# Altium PCB BW0253.PcbDoc (part 2 of 2)
Units mil, origin at the board's own origin, x right, y up, seen from the top; angles counter-clockwise.
Board outline 984.25 x 939.45 mil, 4 copper layers (Top Layer, MidLayer 1, MidLayer 2, Bottom Layer), stack 63.115 mil thick; 49 components, 37 nets, 139 pads, 74 vias.
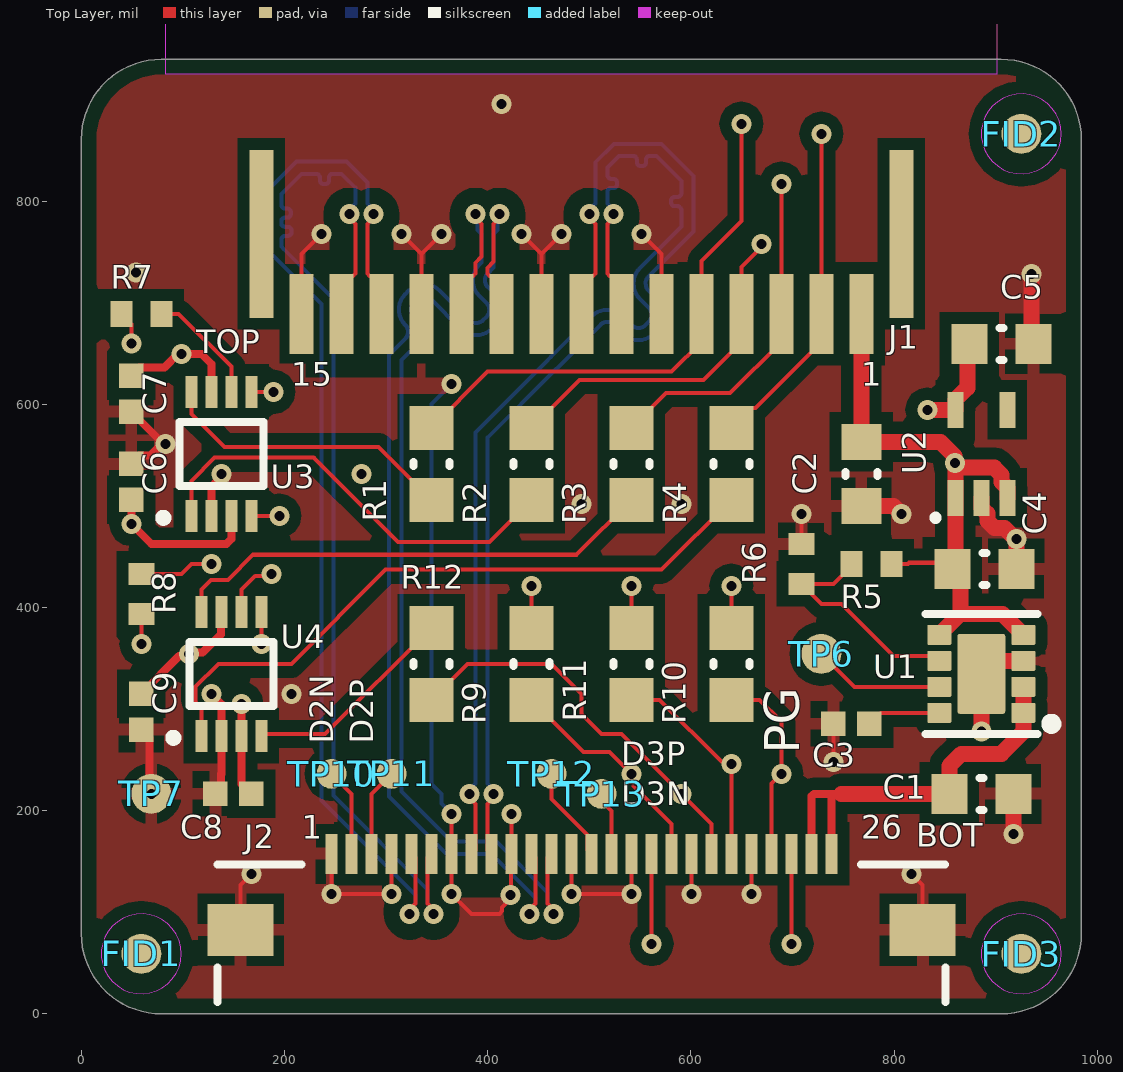
[diagram p0: Top Layer view]

## Via types
v1: diameter 19.68, hole 9.84, Top Layer to Bottom Layer, tented both sides, 74 vias

## Nets (pads, with @x,y where several pads share a name; then routed paths per layer and width w, separated by ;. In a path a pad name is that pad's centre, name@x,y a point inside that pad or via, vN(x,y) a via of type N, cw(c..) or ccw(c..) an arc to the next point about the centre after c; other vN are vias at no path point) (continued)
I2C_SCL_1V8: (continued)
  Top Layer w4: v1(177.17,364.17) U4.5 ; R11.2 v1(541.34,421.26)
  MidLayer 1 w4: v1(177.17,364.17) 216.54,403.54 462.6,403.54 480.31,421.26 v1(541.34,421.26)
I2C_SCL_3V3: R3.1 U4.8 | length 481.6
  Top Layer w4: U4.8 118.11,417.42 127.76,427.07 144.36,427.07 169.12,451.83 487.27,451.83 R3.1
I2C_SCL_RPI: J1.P3 R3.2 TP3.1 | length 338.2
  Top Layer w4: R3.2 575.68,611.11 638.67,611.11 688.98,661.42 J1.P3 v1(688.98,816.93)
I2C_SDA: J2.20 R12.1 TP16.1 | length 396.7
  Top Layer w4: R12.1 379.92,344.49 462.6,344.49 492.13,314.96 492.13,295.28 511.81,275.59 531.5,275.59 v1(590.55,216.54) 620.43,186.65 J2.20
I2C_SDA_1V8: R12.2 U4.4 | length 211.4
  Top Layer w4: U4.4 179.02,275.47 240.04,275.47 R12.2
I2C_SDA_3V3: R4.1 U4.1 | length 654.4
  Top Layer w4: U4.1 118.11,301.45 112.11,307.45 112.11,321.52 135.08,344.49 206.69,344.49 299.31,437.1 570.96,437.1 R4.1
I2C_SDA_RPI: J1.P2 R4.2 TP4.1 | length 328.4
  Top Layer w4: R4.2 659.42,596.43 663.35,596.43 728.35,661.42 J1.P2 v1(728.35,866.14)
MIPI_C_N: J1.P8 J2.9 | length 1095.6
  Top Layer w3.94: J2.9 400.02,161.35 400.02,206.4 405.9,212.27 v1(405.9,216.54) ; J1.P8 492.13,716.54 501.97,726.38 503.54,726.38 505.84,728.68 505.84,777.27 499.97,783.14 v1(499.97,787.4)
  Bottom Layer w3.94: v1(405.9,216.54) 405.9,220.8 400.02,226.67 400.02,567.35 465.34,632.66 470.94,638.26 510.85,678.17 cw(c517.65,671.43) 524.42,678.2 ; v1(499.97,787.4) 499.97,791.66 505.84,797.54 505.84,837.68 524.46,856.3 570.87,856.3 602.49,824.68 602.49,769.81 563.84,731.16 558.25,725.58 ; 524.44,678.18 533.24,669.38 ccw(c548.45,684.59) 563.68,669.41 567.02,672.74 ccw(c551.83,687.98) 567.02,703.21 558.25,711.99 ; 558.22,725.55 ccw(c565,718.78) 558.24,711.99
MIPI_C_P: J1.P7 J2.8 | length 1095.6
  Top Layer w3.94: v1(382.21,216.54) 382.21,212.27 388.09,206.4 388.09,161.35 J2.8 ; v1(523.65,787.4) 523.65,783.14 517.78,777.27 517.78,728.68 520.09,726.38 521.65,726.38 531.5,716.54 J1.P7
  Bottom Layer w3.94: v1(382.21,216.54) 382.21,220.8 388.09,226.67 388.09,572.29 456.9,641.1 462.5,646.7 502.41,686.62 cw(c517.65,671.43) 532.87,686.63 541.64,677.86 ; v1(523.65,787.4) 523.65,791.66 517.78,797.54 517.78,798 517.78,808.91 cw(c521.72,808.91) 521.72,812.84 523.65,812.84 ccw(c523.65,816.42) 527.23,816.42 527.23,818.21 ccw(c523.65,818.21) 523.65,821.78 521.72,821.78 cw(c521.72,825.72) 517.78,825.72 517.78,832.74 518.04,833 529.4,844.36 532,844.36 542.91,844.36 cw(c542.91,840.43) 546.84,840.43 546.84,837.94 ccw(c550.42,837.94) 550.42,834.36 552.21,834.36 ccw(c552.21,837.94) 555.78,837.94 555.78,840.43 cw(c559.72,840.43) 559.72,844.36 565.92,844.36 570,840.28 590.55,819.73 590.55,817 590.55,807.78 cw(c586.61,807.78) 586.61,803.84 584.13,803.84 ccw(c584.13,800.27) 580.55,800.27 580.55,798.48 ccw(c584.13,798.48) 584.13,794.91 586.61,794.91 cw(c586.61,790.97) 590.55,790.97 590.55,789 590.55,774.76 555.4,739.6 549.81,734.02 ccw(c565,718.78) 549.81,703.54 558.58,694.78 cw(c551.83,687.98) 558.58,681.19 555.25,677.85 cw(c548.45,684.59) 541.66,677.84
MIPI_D0_N: J1.P14 J2.6 | length 1095.6
  Top Layer w3.94: J1.P14 255.91,716.54 265.75,726.38 267.32,726.38 269.62,728.68 269.62,777.27 263.75,783.14 v1(263.75,787.4) ; J2.6 340.97,153.61 340.97,131.89 340.97,108.56 346.84,102.69 v1(346.84,98.43)
  Bottom Layer w3.94: v1(263.75,787.4) 263.75,791.66 269.62,797.54 269.62,813.06 258,824.68 255.91,826.77 247.72,826.77 ccw(c247.72,822.83) 243.78,822.83 243.78,820.35 cw(c240.21,820.35) 240.21,816.77 238.42,816.77 cw(c238.42,820.35) 234.84,820.35 234.84,822.83 ccw(c230.91,822.83) 230.91,826.77 220,826.77 216.54,826.77 196.85,807.09 196.85,803 196.85,796.44 ccw(c200.79,796.44) 200.79,792.5 202.57,792.5 cw(c202.57,788.93) 206.14,788.93 206.14,787.14 cw(c202.57,787.14) 202.57,783.57 200.43,783.57 ccw(c200.43,779.99) 196.85,779.99 196.85,778.21 ccw(c200.43,778.21) 200.43,774.63 203.28,774.63 cw(c203.28,771.06) 206.85,771.06 206.85,769.27 cw(c203.28,769.27) 203.28,765.69 200.79,765.69 ccw(c200.79,761.76) 196.85,761.76 196.85,755.07 198.92,753 248.16,703.76 248.16,214.8 340.97,121.98 340.97,108.56 346.84,102.69 v1(346.84,98.43)
MIPI_D0_P: J1.P13 J2.5 | length 1095.6
  Top Layer w3.94: v1(287.43,787.4) 287.43,783.14 281.56,777.27 281.56,728.68 283.87,726.38 285.43,726.38 295.28,716.54 J1.P13 ; v1(323.16,98.43) 323.16,102.69 329.03,108.56 329.03,126.95 329.03,153.61 J2.5
  Bottom Layer w3.94: v1(287.43,787.4) 287.43,791.66 281.56,797.54 281.56,818 260.85,838.71 211.59,838.71 184.91,812.03 184.91,750.13 236.22,698.82 236.22,209.85 329.03,117.04 329.03,108.56 323.16,102.69 v1(323.16,98.43)
MIPI_D1_N: J1.P11 J2.11 | length 1094.7
  Top Layer w3.94: J1.P11 374.02,716.54 383.86,726.38 385.43,726.38 387.73,728.68 387.73,739.2 393.7,745.16 393.7,777.27 387.83,783.14 v1(387.83,787.4) ; v1(441.27,98.43) 441.27,102.69 447.14,108.56 447.14,153.61 J2.11
  Bottom Layer w3.94: 318.84,678.06 cw(c334.08,693.24) 318.89,708.48 322.23,711.82 cw(c337.47,696.63) 352.68,711.83 381.83,682.69 ccw(c388.63,689.43) 395.42,682.67 ; 318.88,678.03 cw(c312.1,671.26) 318.85,664.47 303.02,648.65 303.02,571.98 303.02,214.04 359.58,157.48 403.83,157.48 447.14,114.17 447.14,108.56 441.27,102.69 v1(441.27,98.43) ; v1(387.83,787.4) 389.76,785.46 389.76,771.65 393.7,767.72 393.7,746.32 393.7,739.32 391.61,737.23 ccw(c406.8,721.99) 391.61,706.76 398.76,699.61 cw(c392.02,692.81) 398.77,686.02 395.43,682.68
MIPI_D1_P: J1.P10 J2.12 | length 1094.7
  Top Layer w3.94: v1(411.51,787.4) 411.51,783.14 405.64,777.27 405.64,740.22 399.67,734.25 399.67,728.68 401.98,726.38 403.54,726.38 413.39,716.54 J1.P10 ; J2.12 459.08,153.61 459.08,108.56 464.95,102.69 v1(464.95,98.43)
  Bottom Layer w3.94: 327.3,686.48 cw(c334.08,693.24) 327.33,700.03 330.67,703.37 ; 327.33,686.45 cw(c312.1,671.26) 327.29,656.03 314.96,643.7 314.96,570.21 314.96,218.98 364.53,169.42 408.78,169.42 459.08,119.12 459.08,108.56 464.95,102.69 v1(464.95,98.43) ; 330.68,703.38 cw(c337.47,696.63) 344.24,703.4 ; 344.26,703.37 373.42,674.21 ccw(c388.63,689.43) 403.87,674.24 407.2,677.58 ccw(c392.02,692.81) 407.2,708.05 400.05,715.2 cw(c406.8,721.99) 400.02,728.76 ; 400.05,728.79 405.64,734.38 405.64,767.72 409.57,771.65 409.57,785.46 v1(411.51,787.4)
MIPI_D2_N: J2.3 TP11.1 | length 86.9
  Top Layer w4: J2.3 285.79,216.54 TP11.1
MIPI_D2_P: J2.2 TP10.1 | length 86.9
  Top Layer w4: TP10.1 266.1,216.54 J2.2
MIPI_D3_N: J2.15 TP13.1 | length 63.1
  Top Layer w4: TP13.1 512.17,209.63 522.01,199.79 J2.15
MIPI_D3_P: J2.14 TP12.1 | length 95
  Top Layer w4: TP12.1 462.95,211.24 498.42,175.78 498.42,161.39 J2.14
NetC3_2: C3.2 U1.8 | length 73.4
  Top Layer w4: C3.2 786.42,296.26 U1.8
NetR7_1: R7.1 U3.6 | length 115.2
  Top Layer w4: R7.1 95.57,688.98 147.64,636.91 U3.6
NetR8_1: R8.1 U4.6 | length 193.9
  Top Layer w4: R8.1 98.43,433.07 108.27,442.91 v1(127.95,442.91) ; U4.6 157.48,417.42 171.17,431.1 185.04,431.1 v1(187.01,433.07)
  MidLayer 1 w4: v1(127.95,442.91) 130.67,442.91 140.51,433.07 v1(187.01,433.07)
VDD_5V: C1.2 J2.25 J2.26 U1.1 U1.2 | length 421.4
  Top Layer w7.87: J2.25 718.86,214.19 721.2,216.54 739.71,216.54 ; J2.26 738.54,215.36 739.71,216.54 ; 758.23,216.54 739.71,216.54
  Top Layer w15.75: 748.03,216.54 C1.2 854.33,244.09 866.14,255.91 905.51,255.91 927.17,277.56 U1.1 U1.2
pads on no net: FID1.1 FID2.1 FID3.1 J1.S1 J1.S2 U2.4

## Polygon pours and split planes (outlines as drawn)
GND on MidLayer 2 "L3_GND" (solid, remove dead copper, pour order 18): 0,78.74 0,860.71 cw(c78.74,860.71) 78.74,939.45 905.51,939.45 cw(c905.51,860.71) 984.25,860.71 984.25,78.74 cw(c905.51,78.74) 905.51,0 78.74,0 cw(c78.74,78.74)
GND on MidLayer 1 "L2_GND" (solid, remove dead copper, pour order 19): 0,78.74 0,860.71 cw(c78.74,860.71) 78.74,939.45 905.51,939.45 cw(c905.51,860.71) 984.25,860.71 984.25,78.74 cw(c905.51,78.74) 905.51,0 78.74,0 cw(c78.74,78.74)
GND on Top Layer "L1_GND" (solid, remove dead copper, pour order 17): 0,78.74 0,860.71 cw(c78.74,860.71) 78.74,939.45 905.51,939.45 cw(c905.51,860.71) 984.25,860.71 984.25,78.74 cw(c905.51,78.74) 905.51,0 78.74,0 cw(c78.74,78.74)
GND on Bottom Layer "L4_GND" (solid, remove dead copper, pour order 20): 0,78.74 0,860.71 cw(c78.74,860.71) 78.74,939.45 905.51,939.45 cw(c905.51,860.71) 984.25,860.71 984.25,78.74 cw(c905.51,78.74) 905.51,0 78.74,0 cw(c78.74,78.74)

## Silkscreen, mask and mechanical layers (free items; w line width, h text height)
Top Overlay:
  text "TOP" at 113,642.42 h39.37
  text "D2N" at 255.91,265.75 h39.37 r90
  text "D2P" at 295.28,265.75 h39.37 r90
  text "PG" at 717.88,255.91 h59.06 r90
  text "D3P" at 531.5,236.68 h39.37
  text "D3N" at 531.5,197.31 h39.37
  text "BOT" at 822,156.42 h39.37
Bottom Overlay:
  drawing of 6 lines, arcs and shapes, not listed
  text "EN" at 606.12,875.98 h59.06
  text "RPI_SDA" at 950.08,788.04 h59.06
  text "RPI_SCL" at 922.58,738.83 h59.06
  text "GPI" at 683.74,679.76 h59.06
  text ".revision" at 49.21,649.61 h60 r270
  text ".project_title" at 98.43,649.61 h60 r270
  text "1V8" at 794.49,581.34 h59.06
  text "3V3" at 817.62,522.34 h59.06
  text "GND" at 771.11,473.07 h59.06
  text "CAM_RST" at 501.33,396.09 h59.06 r90
  text "SCL" at 648.98,373.95 h59.06 r90
  text "SDA" at 599.77,354.33 h59.06 r90
  text "AUX_IO1" at 941.61,217.18 h59.06
  text "AUX_IO2" at 948.52,59.7 h59.06
  text "CAM_CLK" at 511.81,49.85 h59.06
Board:
  lines w1.97: 0,78.74 ccw(c78.74,78.74) 78.74,0 905.51,0 ccw(c905.51,78.74) 984.25,78.74 984.25,860.71 ccw(c905.51,860.71) 905.51,939.45 78.74,939.45 ccw(c78.74,860.71) 0,860.71 0,78.74
Drill Drawing:
  circle w10: c-857.52,-566.95 r36.2
  lines w15: -958.38,-652.01 2223.28,-652.01 ; -958.38,-489.12 2223.28,-489.12 ; -539.88,-814.9 -539.88,-326.23 ; -196.15,-814.9 -196.15,-326.23 ; 482.6,-814.9 482.6,-326.23 ; 807.13,-814.9 807.13,-326.23 ; 1279.55,-814.9 1279.55,-326.23 ; -958.38,-814.9 2223.28,-814.9 2223.28,-326.23 -958.38,-326.23 -958.38,-814.9
  text "Symbol" at -860.65,-440.26 h94.49
  text "Count" at -491.01,-440.26 h94.49
  text "Hole Size" at -147.29,-440.26 h94.49
  text "Plated" at 531.46,-440.26 h94.49
  text "Hole Type" at 856,-440.26 h94.49
  text "Drill Layer Pair" at 1328.42,-440.26 h94.49
  text "74" at -491.01,-603.15 h78.74
  text "9.84mil (0.250mm)" at -147.29,-603.15 h78.74
  text "PTH" at 531.46,-603.15 h78.74
  text "Round" at 856,-603.15 h78.74
  text "Top Layer - Bottom Layer" at 1328.42,-603.15 h78.74
  text "74 Total" at -491.01,-766.04 h78.74

## Text inside footprints (layer, text, board x,y; h text height)
J1: Top Overlay "15" at 206.69,610.24 h39.37; Top Overlay "1" at 767.72,610.24 h39.37; Top Component Outline "Slider open" at 889.76,988.19 h39.37 r180; Assembly Notes "Keepout: flex cable region" at 901.57,1082.68 h39.37 r180
J2: Top Overlay "1" at 216.89,164.49 h39.37; Top Overlay "26" at 767.64,164.49 h39.37